# Altium PCB PCB2.PcbDoc
Units mil, origin at the board's own origin, x right, y up, seen from the top; angles counter-clockwise.
Board outline 6000 x 4000 mil, 2 copper layers (Top Layer, Bottom Layer); 55 components, 57 nets, 114 pads, 0 vias.
Unrouted connection lines stored in the file: 79.
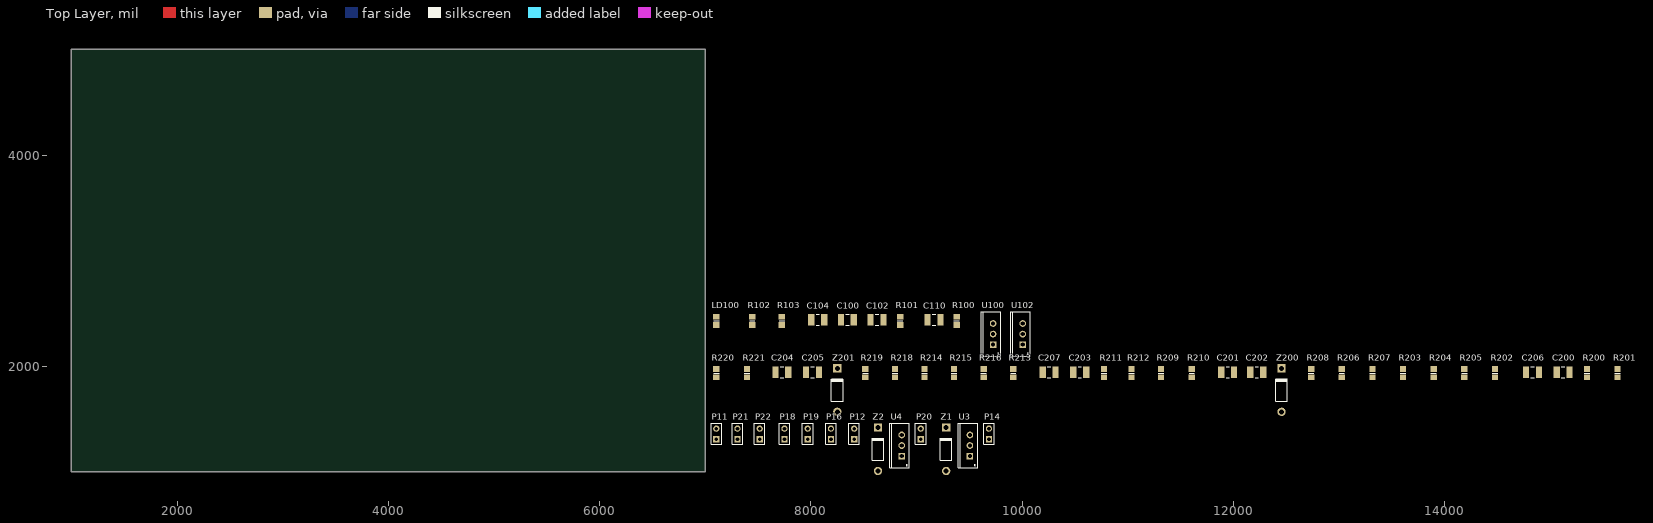
[diagram p0: Top Layer view]
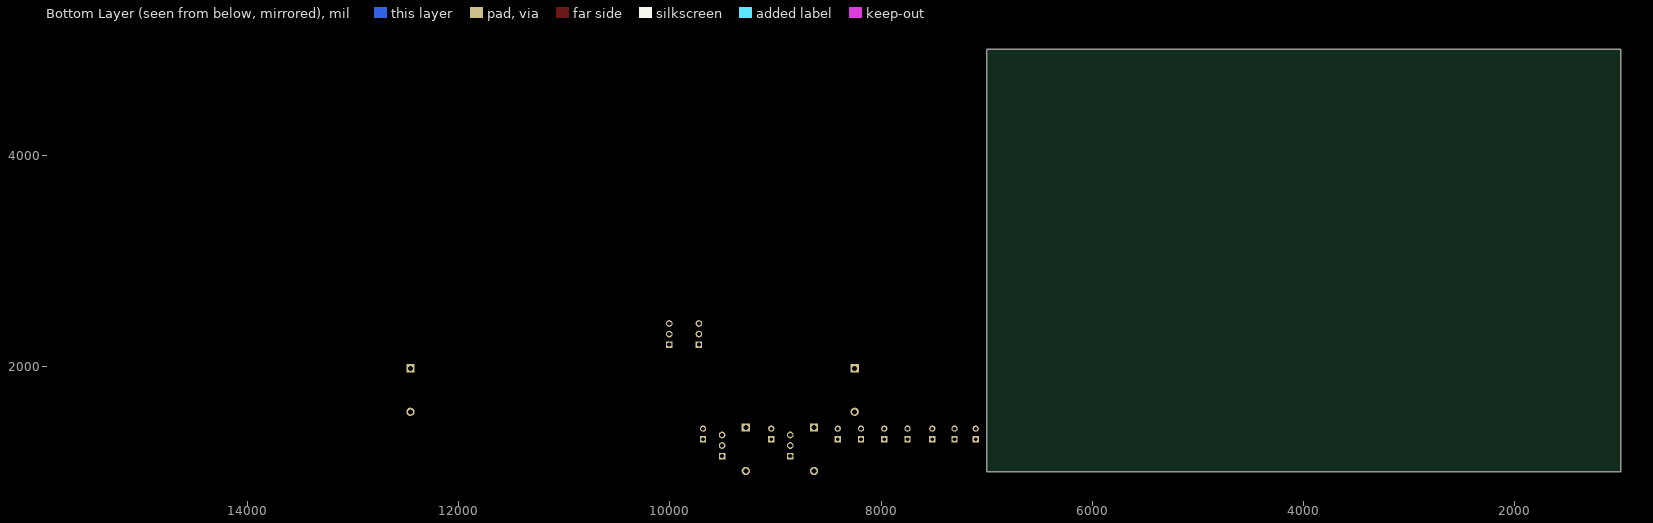
[diagram p1: Bottom Layer view, seen from below]

## Layer stack, top to bottom
Top Solder: solder mask 0.4, Solder Resist, Dk 3.5
Top Layer: signal copper 1.4
Dielectric 1: dielectric 12.6, FR-4, Dk 4.8
Bottom Layer: signal copper 1.4
Bottom Solder: solder mask 0.4, Solder Resist, Dk 3.5

## Board outline
1000,1000 7000,1000 7000,5000 1000,5000

## Design rules (kind name [scope] priority, off if disabled: settings)
Clearance [All] p1: gap=10
PolygonConnect [All] p1: connectstyle=Relief reliefconductorwidth=10 reliefentries=4 polygonreliefangle="90 Angle" airgapwidth=10
RoomDefinition voltageSupplies [InComponentClass('voltageSupplies')] p1: confinementstyle=ConfineIn formatcopy=TRUE lockcomponents=FALSE outline 7045,2085 10125,2085 10125,2625 7045,2625
RoomDefinition uController [InComponentClass('uController')] p2: confinementstyle=ConfineIn formatcopy=TRUE lockcomponents=FALSE outline 7315,2945 9315,2945 9315,3945 7315,3945
RoomDefinition Signals [InComponentClass('Signals')] p3: confinementstyle=ConfineIn formatcopy=TRUE lockcomponents=FALSE outline 7045,1520 15810,1520 15810,2130 7045,2130
RoomDefinition main [InComponentClass('main')] p4: confinementstyle=ConfineIn formatcopy=TRUE lockcomponents=FALSE outline 7045,960 9810,960 9810,1570 7045,1570
RoutingVias [All] p1: holewidth=28 width=50 viastyle="Through Hole" minholewidth=28 minwidth=50 maxholewidth=28 maxwidth=50
SolderMaskExpansion [All] p1: expansion=4
Width [All] p1: maxlimit=10 minlimit=10 preferedwidth=10
30 further rules are at their usual default settings.

## Classes and differential pairs
component class voltageSupplies: C100 C101 C102 C103 C104 C108 C109 C110 D100 D101 D102 LD100 R100 R101 R102 R103 U100 U102
component class uController: C300 C301 C302 C303 C304 C305 C306 C307 C308 L300 P301 P302 R300 R301 R302 U300 U301 U302 Y300
component class Signals: C200 C201 C202 C203 C204 C205 C206 C207 R200 R201 R202 R203 R204 R205 R206 R207 R208 R209 R210 R211 R212 R213 R214 R215 R216 R218 R219 R220 R221 U200 U201 Z200 Z201
component class main: C4 C5 C6 C7 C8 C9 C10 C11 C12 D2 D3 D4 LD1 P11 P12 P14 P16 P18 P19 P20 P21 P22 R2 R3 R4 R5 R6 R7 R8 R9 U3 U4 Z1 Z2

## Components (designator, comment, footprint, x,y, rotation, side; value= is the part's Value field where it differs from the comment)
C100 "Cap" C1210_M 8345,2440 r0 top
C102 "Cap" C1210_M 8625,2440 r0 top
C104 "Cap" C1210_M 8065,2440 r0 top
C110 "Cap" C1210_M 9165,2440 r0 top
C200 "Cer" C1210_M 15120,1945 r0 top
C201 "Cer" C1210_M 11945,1945 r0 top
C202 "Cer" C1210_M 12220,1945 r0 top
C203 "Cer" C1210_M 10545,1945 r0 top
C204 "Cer" C1210_M 7725,1945 r0 top
C205 "Cer" C1210_M 8015,1945 r0 top
C206 "Cer" C1210_M 14830,1945 r0 top
C207 "Cer" C1210_M 10255,1945 r0 top
LD100 "RED" 6-0805_M 7105,2430 r90 top
P11 "12V to Driver" HDR1X2 7105,1310 r90 top
P12 "Due Voltage Supplier" HDR1X2 8410,1310 r90 top
P14 "Voltage Sensor In" HDR1X2 9685,1310 r90 top
P16 "Battery Connection" HDR1X2 8190,1310 r90 top
P18 "Voltage Sensor to uC (3v3)" HDR1X2 7750,1310 r90 top
P19 "12V to Fan" HDR1X2 7970,1310 r90 top
P20 "Current Sensor In" HDR1X2 9040,1310 r90 top
P21 "Current Sensor to uC (3v3)" HDR1X2 7305,1310 r90 top
P22 "+5V (Current Sensor)" HDR1X2 7515,1310 r90 top
R100 "Res1" 6-0805_M 9380,2430 r90 top
R101 "Res1" 6-0805_M 8845,2430 r90 top
R102 "Res1" 6-0805_M 7445,2430 r90 top
R103 "Res1" 6-0805_M 7725,2430 r90 top
R200 "1%" 6-0805_M 15345,1935 r90 top
R201 "1%" 6-0805_M 15635,1935 r90 top
R202 "1%" 6-0805_M 14475,1935 r90 top
R203 "1%" 6-0805_M 13605,1935 r90 top
R204 "1%" 6-0805_M 13895,1935 r90 top
R205 "1%" 6-0805_M 14185,1935 r90 top
R206 "1%" 6-0805_M 13025,1935 r90 top
R207 "1%" 6-0805_M 13315,1935 r90 top
R208 "1%" 6-0805_M 12735,1935 r90 top
R209 "1%" 6-0805_M 11315,1935 r90 top
R210 "1%" 6-0805_M 11605,1935 r90 top
R211 "1%" 6-0805_M 10775,1935 r90 top
R212 "1%" 6-0805_M 11035,1935 r90 top
R213 "1%" 6-0805_M 9915,1935 r90 top
R214 "1%" 6-0805_M 9075,1935 r90 top
R215 "1%" 6-0805_M 9355,1935 r90 top
R216 "1%" 6-0805_M 9635,1935 r90 top
R218 "1%" 6-0805_M 8795,1935 r90 top
R219 "1%" 6-0805_M 8515,1935 r90 top
R220 "1%" 6-0805_M 7105,1935 r90 top
R221 "1%" 6-0805_M 7395,1935 r90 top
U3 "TL783" TO-220AB 9505,1250 r90 top
U4 "LM7805" TO-220AB 8860,1250 r90 top
U100 "TL783" TO-220AB 9725,2305 r90 top
U102 "LM7805" TO-220AB 10005,2305 r90 top
Z1 "3V3" DO-41 9280,1215 r90 top
Z2 "3V3" DO-41 8635,1215 r90 top
Z200 "5V1" DO-41 12455,1775 r90 top
Z201 "5V1" DO-41 8250,1775 r90 top

## Footprints (in the part's own frame and the unit in brackets; to place one, negate y for a bottom-side part, rotate by r counter-clockwise, add the part's x,y. Pads: shape width x height; smd on the part's side, far side on the other; paste and mask are expansions set on the pad)
6-0805_M [mm] "Chip Resistor, Body 2.0x1.2mm, IPC Low Density"
  rect 1.4x1.5 smd: 1(-1,0) 2(1,0)
  silkscreen extent 0,-0.65 0,0.65, body extent -1.07,-0.7 1.07,0.7, height 0.7
C1210_M [mm] "Chip Capacitor, Body 3.2x2.5mm, IPC Low Density"
  rect 1.5x2.8 smd: 1(-1.55,0) 2(1.55,0)
  silkscreen extent -0.4,-1.3 0.4,1.3, body extent -1.7,-1.35 1.7,1.35, height 1.5
DO-41 [mm] "Diode, Axial; Body 5.2 x 2.7 mm (LxDia. max), Lead Dia. 0.86 mm (max)"
  round 2 hole 1.2: 1(-5.23,0)
  rect 2x2 hole 1.2: 2(5.23,0)
  silkscreen extent -2.65,-1.4 2.75,1.4
HDR1X2 [mm] "Connector; Header; 2 Position"
  rect 1.5x1.5 hole 0.9: 1(0,0)
  round 1.5 hole 0.9: 2(2.54,0)
  silkscreen extent -1.27,-1.27 3.81,1.27
TO-220AB [mm] "TO, Thru-Hole, Vertical, Heatsink Mounted; 3 In-Line Leads; Pitch 2.54 mm"
  rect 1.6x1.6 hole 1: 1(-2.54,0)
  round 1.6 hole 1: 2(0,0) 3(2.54,0)
  silkscreen extent -5.35,-1.85 5.35,2.85, body extent -5.4,-1.9 5.4,2.9, height 19.3

## Part data
C100 C102 C104 C110: "Capacitor"
C200 C201 C202 C203 C204 C205 C206 C207: library part Cap, "Capacitor"
LD100: library part LED, "Diodo Emissor de Luz"
P11 P12 P14 P16 P18 P19 P20 P21 P22: library part "Header 2", "Header, 2-Pin"
R100 R101 R102 R103: "Resistor"
R200 R201 R202 R203 R204 R205 R206 R207 R208 R209 R210 R211 R212 R213 R214 R215 R216 R218 R219 R220 R221: library part Res1, "Resistor"
U3 U100: library part L7805ACV, "Precision 1A Regulator"
U4 U102: library part µA7805CKC, "Positive-Voltage Regulator"
Z1 Z2 Z200 Z201: library part "D Zener", "Zener Diode"

## Nets (pads, with @x,y where several pads share a name; then routed paths per layer and width w, separated by ;. In a path a pad name is that pad's centre, name@x,y a point inside that pad or via, vN(x,y) a via of type N, cw(c..) or ccw(c..) an arc to the next point about the centre after c; other vN are vias at no path point)
+5V: C110.2 P12.1 P22.1 U4.3 U102.3
+5V_ADC: C206.2 C207.2
+12V: C102.2 P11.1 P19.1 R100.1 R101.2 U3.2 U4.1 U100.2 U102.1
+VBAT: P16.1
-VBAT: C100.1 C102.1 C104.1 C110.1 C201.1 C202.1 C204.1 C205.1 C206.1 C207.1 LD100.2 P11.2 P12.2 P16.2 P18.2 P19.2 P21.2 P22.2 R102.1 R103.1 R206.2 R210.1 R221.1 U4.2 U102.2 Z1.1 Z2.1 Z200.1 Z201.1
CAN_CS: 
CAN_INT: 
CAN_SCK: 
CAN_SI: 
CAN_SO: 
CANH: 
CANL: 
NetC4_2: U3.3
NetC8_2: C203.2 P18.1 Z1.2 Z201.2
NetC9_2: U3.1
NetC10_2: C200.2 P21.1 Z2.2 Z200.2
NetC100_2: C100.2 U100.3
NetC104_2: C104.2 R100.2 R102.2 R103.2 U100.1
NetC200_1: C200.1 R204.1 R205.2
NetC201_2: C201.2 R203.1 R204.2
NetC202_2: C202.2 R205.1
NetC203_1: C203.1 R215.1 R216.2
NetC204_2: C204.2 R214.1 R215.2
NetC205_2: C205.2 R216.1
NetC300_2: 
NetC302_2: 
NetC305_1: 
NetLD1_1: 
NetLD100_1: LD100.1 R101.1
NetP14_1: P14.1 P14.2
NetP20_1: P20.1 P20.2
NetR200_1: R200.1 R201.2
NetR200_2: R200.2 R202.2
NetR201_1: R201.1 R203.2
NetR202_1: R202.1 R207.2
NetR206_1: R206.1
NetR207_1: R207.1 R208.2
NetR208_1: R208.1 R209.2
NetR209_1: R209.1 R210.2
NetR211_1: R211.1 R212.2
NetR211_2: R211.2 R213.2
NetR212_1: R212.1 R214.2
NetR213_1: R213.1 R218.2
NetR218_1: R218.1 R219.2
NetR219_1: R219.1 R220.2
NetR220_1: R220.1 R221.2
NetR301_2: 
NetR302_2: 
NetU201_3: 
NetU300_5: 
OSC1: 
OSC2: 
RTS: 
RXCAN: 
TXCAN: 
USART_RX: 
USART_TX: 